# Allegro board cacio.brd
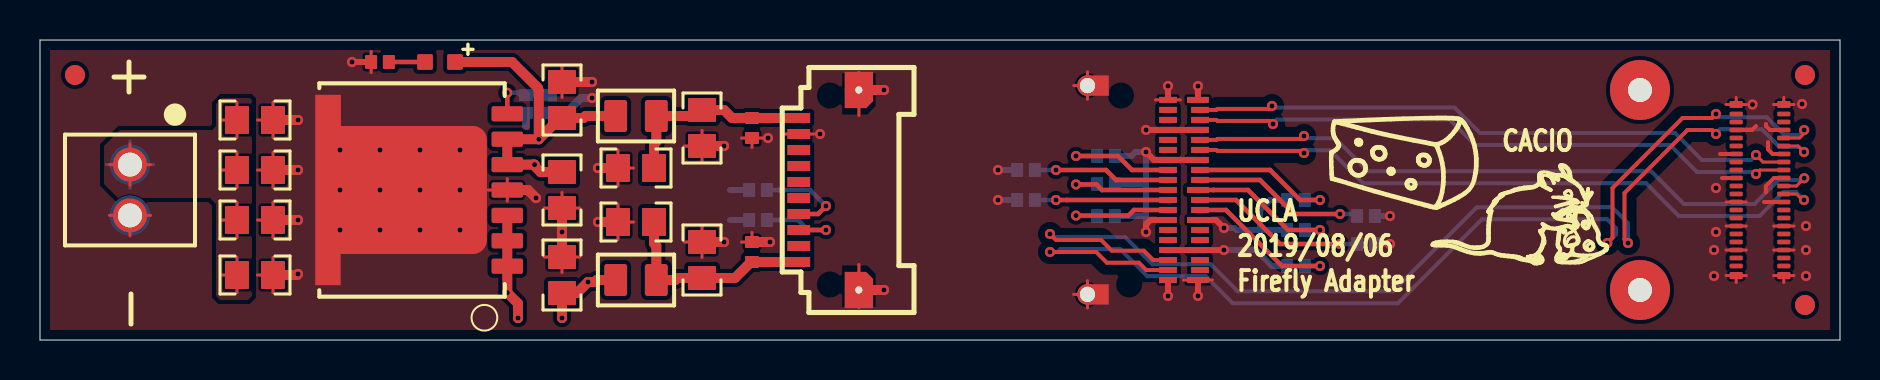
[diagram p0: board, top side]
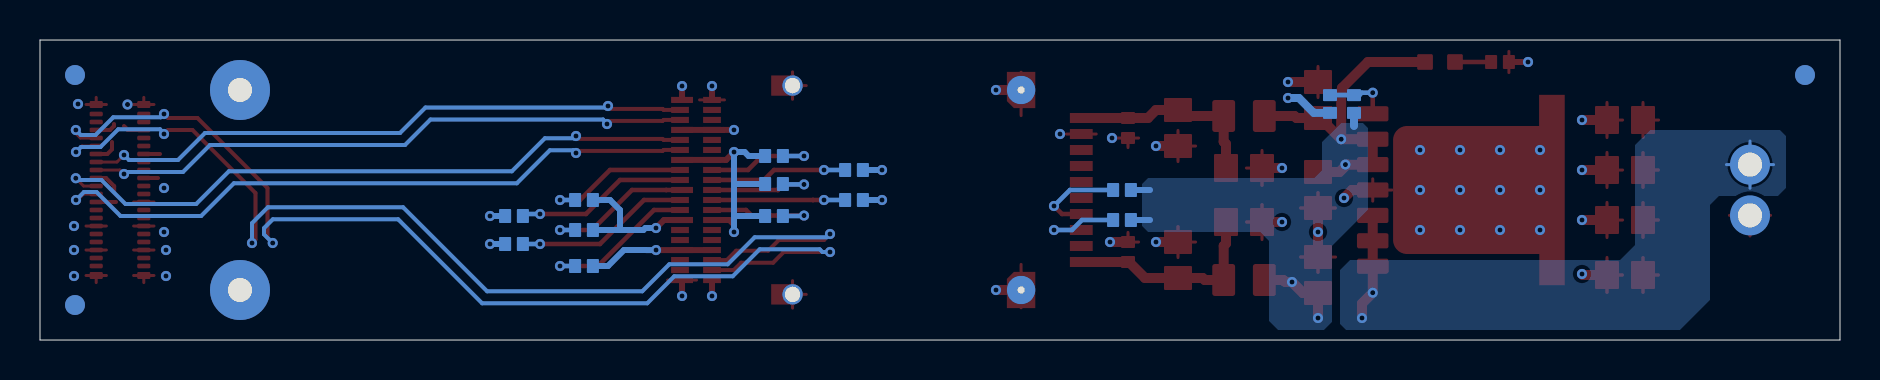
[diagram p1: board, bottom side, seen from below]

Outline 90 x 15 mm; copper layers: TOP, LAYER_1, LAYER_2, BOTTOM. Coordinates in mm from the lower left corner of the outline.
Outline path: 0,15 90,15 90,0 0,0 0,15

## Design rules (mm)
constraint set DEFAULT: min track width 0.229, pair gap 0.508
net group DP_RX: nets RXN RXP
net group DP_TX1: nets TX1N TX1P
net group DP_TX2: nets TX2N TX2P
net group DP_TX3: nets TX3N TX3P
net group DP_TX4: nets TX4N TX4P
net group POWER: nets +3V3 VCCRX VCCTX

## Placement (name value [footprint] x y rotation side)
C1  47 uF  [C0805]  26.1 12 90 top
C2  0.47 uF  [C0402]  35.6 10.6 270 top
C3  47 uF  [C0805]  33.1 10.6 270 top
C4  47 uF  [C0805]  29.8 8.6 180 top
C5  47 uF  [C0805]  26.1 3.25 90 top
C6  0.47 uF  [C0402]  35.6 4.4 90 top
C7  47 uF  [C0805]  29.8 5.9 180 top
C8  47 uF  [C0805]  33.1 4 90 top
C9  47 uF  [C0805]  10.75 11 0 top
C10  47 uF  [C0805]  10.75 8.5 0 top
C11  47 uF  [C0805]  10.75 6 0 top
C12  47 uF  [C0805]  10.75 3.25 0 top
C13  47 uF  [C0805]  26.1 7.5 270 top
D1  Green  [LED0603]  20 13.9 0 top
J1  -  [UCC8-010-1-H-S-1-A]  39.5 7.5 270 top
J2  UEC5-019-2_x4  [UEC5-019-2-H-D-RA-1-A]  54.05 7.5 270 top
J3  VTRX+_HEADER  [DF40-C-40DP-0P4V]  86 7.5 0 top
L1  1 uH  [SRP2010-1R0M]  29.8 11.2 0 top
L2  1 uH  [SRP2010-1R0M]  29.8 3 0 top
NOREF  -  []  64.25 6 0 top
NOREF#2  -  []  7.72 0 90 top
NOREF#3  -  []  0 13.35 0 top
NOREF#4  -  []  69.5 3.25 0 top
NOREF#5  -  [unnamed#2]  88.25 13.25 0 top
NOREF#6  -  [unnamed#2]  1.75 13.25 0 top
NOREF#7  -  [unnamed#2]  88.25 1.75 0 top
NOREF#8  -  [unnamed#3]  86 7.5 0 top
NOREF#9  -  [unnamed#2]  1.75 13.25 180 bottom
NOREF#10  -  [unnamed#2]  88.25 13.25 180 bottom
NOREF#11  -  [unnamed#2]  88.25 1.75 180 bottom
R1  4.7k  [R0402]  35.9 6 180 bottom
R2  4.7k  [R0402]  35.9 7.5 180 bottom
R3  49R9  [R0402]  62.8 7 0 bottom
R4  49R9  [R0402]  66.3 6.2 180 bottom
R5  49R9  [R0402]  62.8 5.5 0 bottom
R6  49R9  [R0402]  66.3 4.8 180 bottom
R7  49R9  [R0402]  62.8 3.7 0 bottom
R8  49R9  [R0402]  53.3 6.2 180 bottom
R9  49R9  [R0402]  49.3 7 0 bottom
R10  49R9  [R0402]  53.3 7.8 180 bottom
R11  49R9  [R0402]  49.3 8.5 0 bottom
R12  49R9  [R0402]  53.3 9.2 180 bottom
R13  5k6  [R0402]  24.3 11.8 270 bottom
R14  1k  [R0402]  25.5 11.8 90 bottom
R15  510R  [R0402]  17 13.9 0 top
U1  MIC69502WR  [SPAK7_MD]  18.6 7.5 90 top
U2  TE/282834-2  [TE-282834-2]  4.5 8.77 270 top

## Library data of the parts
C1-C13 = CAP NP
D1 = LED
J1 = UCC8-010-1-H-S-1-A
J2 = UEC5-019-2_x4
J3 = VTRX+_HEADER
L1 L2 = INDUCTOR
R1-R15 = R
U1 = MIC69502
U2 = TE/282834-2

## Footprints (pads in the part's own frame, mm; a bottom-side part is the same pattern mirrored in y, then rotated)
C0402
  rrect 0.6x0.7 smd: 1(-0.5,0) 2(0.5,0)
C0805
  rrect 1.2x1.4 smd: 1(-0.9,0) 2(0.9,0)
DF40-C-40DP-0P4V
  rrect 0.66x0.23 smd: 1(1.19,3.8) 2(-1.19,3.8) 3(1.19,3.4) 4(-1.19,3.4) 5(1.19,3) 6(-1.19,3) 7(1.19,2.6) 8(-1.19,2.6) 9(1.19,2.2) 10(-1.19,2.2) 11(1.19,1.8) 12(-1.19,1.8) 13(1.19,1.4) 14(-1.19,1.4) 15(1.19,1) 16(-1.19,1) 17(1.19,0.6) 18(-1.19,0.6) 19(1.19,0.2) 20(-1.19,0.2) 21(1.19,-0.2) 22(-1.19,-0.2) 23(1.19,-0.6) 24(-1.19,-0.6) 25(1.19,-1) 26(-1.19,-1) 27(1.19,-1.4) 28(-1.19,-1.4) 29(1.19,-1.8) 30(-1.19,-1.8) 31(1.19,-2.2) 32(-1.19,-2.2) 33(1.19,-2.6) 34(-1.19,-2.6) 35(1.19,-3) 36(-1.19,-3) 37(1.19,-3.4) 38(-1.19,-3.4) 39(1.19,-3.8) 40(-1.19,-3.8)
  rrect 0.66x0.35 smd: M1(1.19,4.275) M2(-1.19,4.275) M3(1.19,-4.275) M4(-1.19,-4.275)
LED0603
  rrect 0.787x0.787 smd: 1(-0.749,0) 2(0.749,0)
R0402
  rrect 0.6x0.7 smd: 1(-0.445,0) 2(0.445,0)
SPAK7_MD
  rrect 0.762x1.575 smd: 1(-3.81,-4.764) 2(-2.54,-4.764) 3(-1.27,-4.764) 4(0,-4.764) 5(1.27,-4.764) 6(2.54,-4.764) 7(3.81,-4.764)
  custom 9.52x8.581 smd: 8(0,0.546)
SRP2010-1R0M
  rrect 1.143x1.6 smd: 1(-1.016,0) 2(1.016,0)
TE-282834-2
  round 1.7 hole 1.2: 1(0,0) 2(2.54,0)
UCC8-010-1-H-S-1-A
  round 0 hole 0.89 unplated: (-4.725,0) (4.725,0)
  rect 0.5x1.14 smd: 1(-3.6,-1.56) 2(-2.8,-1.56) 3(-2,-1.56) 4(-1.2,-1.56) 5(-0.4,-1.56) 6(0.4,-1.56) 7(1.2,-1.56) 8(2,-1.56) 9(2.8,-1.56) 10(3.6,-1.56)
  custom 1.81x1.42 hole 1.16: 11(-5,1.45) 12(5,1.45)
UEC5-019-2-H-D-RA-1-A
  round 0 hole 0.889 unplated: (-4.724,0) (4.724,0.406)
  round 1.016 hole 0.762: 3(-5.22,-1.676) 4(5.22,-1.676)
  rect 0.305x1.092 smd: A1(-4.503,3.848) A4(-3.002,3.848) A7(-1.501,3.848) A10(0,3.848) A13(1.501,3.848) A16(3.002,3.848) A19(4.503,3.848)
  rect 0.305x0.889 smd: A2(-4.003,3.95) A3(-3.503,3.95) A5(-2.502,3.95) A6(-2.002,3.95) A8(-1.001,3.95) A9(-0.5,3.95) A11(0.5,3.95) A12(1.001,3.95) A14(2.002,3.95) A15(2.502,3.95) A17(3.503,3.95) A18(4.003,3.95) B1(-4.503,2.349) B2(-4.003,2.349) B3(-3.503,2.349) B4(-3.002,2.349) B5(-2.502,2.349) B6(-2.002,2.349) B7(-1.501,2.349) B8(-1.001,2.349) B9(-0.5,2.349) B10(0,2.349) B11(0.5,2.349) B12(1.001,2.349) B13(1.501,2.349) B14(2.002,2.349) B15(2.502,2.349) B16(3.002,2.349) B17(3.503,2.349) B18(4.003,2.349) B19(4.503,2.349)
unnamed#2
  round 1 smd: 1(0,0)
unnamed#3
  round 3 hole 1.2: (-6,5) (-6,-5)

## Nets
+3V3: C1.1 C5.1 C13.1 D1.2 L1.1 L2.1 R1.2 R2.2 R13.2 U1.5 U1.6(OUT#6)
+VIN: C9.1 C10.1 C11.1 C12.1 U1.1 U1.2 U1.3 U2.1
GND: C1.2 C2.2 C3.2 C4.2 C5.2 C6.2 C7.2 C8.2 C9.2 C10.2 C11.2 C12.2 C13.2 J1.2 J1.11 J1.12 J2.3 J2.4 J2.A1 J2.A4 J2.A7 J2.A13 J2.A16 J2.A19 J2.B1 J2.B4 J2.B7 J2.B13 J2.B16 J2.B19 J3.5 J3.6 J3.11 J3.12 J3.17 J3.18 J3.23 J3.24 J3.29 J3.30 J3.35 J3.36 J3.M1 J3.M2 J3.M3 J3.M4 R3.1 R4.1 R5.1 R6.1 R7.1 R8.1 R9.1 R10.1 R11.1 R12.1 R14.1 R15.1 U1.4 U1.8 U2.2
VCCRX: C6.1 C7.1 C8.1 J1.10 L2.2
VCCTX: C2.1 C3.1 C4.1 J1.1(VCCTX) L1.2
ADJ: R13.1 R14.2 U1.7
K: D1.1(CATHODE) R15.2
RSVD / VCC1V8: J1.9
RXN: J2.B18 J3.7
RXP: J2.B17 J3.9
SCL: J1.8 R1.1
SDA: J1.7 R2.1
T0: J2.A8 R3.2
T1: J2.A9 R4.2
T2: J2.A10 R5.2
T3: J2.A11 R6.2
T4: J2.A12 R7.2
T5: J2.B8 R12.2
T6: J2.B9 R11.2
T7: J2.B10 R10.2
T8: J2.B11 R9.2
T9: J2.B12 R8.2
TX1N: J2.A2 J3.13
TX1P: J2.A3 J3.15
TX2N: J2.A5 J3.19
TX2P: J2.A6 J3.21
TX3N: J3.25
TX3P: J3.27
TX4N: J3.31
TX4P: J3.33

Pads without a net: J1 3 4 5 6; J2 A14 A15 A17 A18 B2 B3 B5 B6 B14 B15; J3 1 2 3 4 8 10 14 16 20 22 26 28 32 34 37 38 39 40; NOREF#5 1; NOREF#6 1; NOREF#7 1; NOREF#9 1; NOREF#10 1; NOREF#11 1

## Via types
v1: diameter 0.508, hole 0.254, TOP to BOTTOM, 87 vias

## Routing (per net, layer and track width the routed paths; a pad name or vN(x,y) marks a point on that pad's centre or on a via; arc(x,y) is an arc through that point)
+3V3: length 24.2
  TOP w0.5: L2.1 27.84,3 27.74,2.9 v1(27.4,2.9) 26.85,2.35 C5.1 v1(26.1,1.1) ; 24.65,8.77 U1.5 U1.6 v1(24.94,10.04) ; 24.65,8.77 25.02,8.4 C13.1 ; 24.65,8.77 v1(24.73,8.77) ; D1.2 23.6,13.9 24.9,12.6 24.9,12.5 24.94,12.46 v1(24.94,10.04) ; L1.1 27.28,11.2 27.18,11.1 C1.1 26,11.1 v1(24.94,10.04)
  BOTTOM w0.3: R1.2 34.5,6 ; R2.2 34.5,7.5
  BOTTOM w0.4: R13.2 24.3,10.7
+VIN: length 24.3
  TOP w0.15: 9.85,5.12 C11.1 ; C11.1 9.07,6 ; C11.1 9.85,6.88 ; 9.85,7.62 C10.1 ; C10.1 9.85,9.38 ; C10.1 9.07,8.5 ; U2.1 5.53,8.77 ; U2.1 3.47,8.77 ; U2.1 4.5,7.74 ; U2.1 4.5,9.8 ; 9.07,3.25 C12.1 ; C12.1 9.85,2.37 ; C12.1 9.85,4.13 ; C9.1 9.85,11.88 ; C9.1 9.85,10.12 ; C9.1 9.07,11
  TOP w0.5: v1(23.9,1.1) 23.9,1.83 v1(23.36,2.36) U1.1 U1.2 U1.3
  BOTTOM w0.15: U2.1 5.68,8.77 ; U2.1 4.5,9.95 ; U2.1 4.5,7.59 ; U2.1 3.32,8.77
GND: length 154.3
  TOP w0.15: C13.2 26.98,6.6 ; C13.2 26.1,7.38 ; C13.2 25.22,6.6 ; J3.M2 85.32,11.78 ; J3.M2 84.3,11.78 ; J3.M2 84.81,12.13 ; 23.36,6.94 U1.4 ; U1.4 22.4,7.5 ; U1.4 23.36,8.06 ; 84.3,4.5 J3.36 85.32,4.5 ; 11.65,2.37 C12.2 ; C12.2 10.87,3.25 ; C12.2 11.65,4.13 ; C2.2 36.13,10.1 ; C2.2 35.07,10.1 ; C2.2 35.6,9.62 ; C4.2 28.9,9.48 ; C4.2 29.68,8.6 ; C4.2 28.9,7.72 ; J2.3 53.06,12.72 ; J2.3 52.37,12.03 ; J2.3 52.37,13.41 ; J2.3 51.69,12.72 ; 10.87,8.5 C10.2 ; C10.2 11.65,7.62 ; C10.2 11.65,9.38 ; 10.87,6 C11.2 ; C11.2 11.65,5.12 ; C11.2 11.65,6.88 ; J3.M3 87.7,3.22 ; J3.M3 87.19,2.87 ; J3.M3 86.68,3.22 ; 40.95,11.22 J1.11 40.95,13.39 ; 16.56,13.37 R15.1 16.56,14.43 ; 25.22,4.15 C5.2 ; C5.2 26.98,4.15 ; C5.2 26.1,3.37 ; 84.3,5.7 J3.30 85.32,5.7 ; 28.9,5.02 C7.2 ; C7.2 29.68,5.9 ; C7.2 28.9,6.78 ; 40.95,1.61 J1.12 40.95,3.78 ; 3.47,6.23 U2.2 ; U2.2 5.53,6.23 ; U2.2 4.5,5.2 ; 87.7,4.5 J3.35 86.68,4.5 ; 86.68,11.78 J3.M1 ; J3.M1 87.19,12.13 ; J3.M1 87.7,11.78 ; 57.02,12 J2.B1 55.78,12 ; 84.81,2.87 J3.M4 ; J3.M4 85.32,3.22 ; J3.M4 84.3,3.22 ; 84.3,6.9 J3.24 85.32,6.9 ; 35.07,4.9 C6.2 35.6,5.38 ; 26.1,13.68 C1.2 26.1,12.12 ; 51.69,2.28 J2.4 ; J2.4 52.37,2.97 ; J2.4 52.37,1.59 ; J2.4 53.06,2.28 ; 58.62,3 J2.A19 57.17,3 ; 87.7,5.7 J3.29 86.68,5.7 ; 33.1,8.92 C3.2 ; C3.2 32.22,9.7 ; C3.2 33.1,10.48 ; 10.87,11 C9.2 ; C9.2 11.65,11.88 ; C9.2 11.65,10.12 ; 32.22,4.9 C8.2 ; C8.2 33.1,4.12 ; C8.2 33.1,5.68 ; 38.68,10.3 J1.2 37.19,10.3
  TOP w0.2: J3.6 85.6,10.5 85.8,10.7 ; J3.11 86.63,9.3 86.4,9.53 86.4,9.9 ; J3.18 84.1,8.1 ; J3.5 86.5,10.5 86.3,10.7 86.3,10.8 ; J3.12 84,9.3 ; J3.23 86.2,6.9 ; J3.17 86.7,8.1 86.29,7.69 86.29,7.41 86.3,7.4
  TOP w0.3: J2.B13 55.53,6 55.3,5.77 v1(55.3,5.4) ; v1(55.3,10.5) 55.85,10.5 55.85,10.5 J2.B4 J2.A4 ; J2.B19 v1(56.4,2.2) ; J2.A13 58.8,6 v1(59.2,5.6) ; J2.B16 J2.A16 v1(59.2,4.5) ; v1(57.9,12.7) J2.A1 ; v1(56.4,12.7) J2.B1 ; R15.1 v1(15.6,13.9) ; J2.A7 J2.B7 55.7,9 v1(55.3,9.4) ; J2.A19 v1(57.9,2.2)
  TOP w0.5: C9.2 v1(12.9,11) ; C5.2 v1(26.1,5.4) C13.2 ; C1.2 v1(27.6,12.9) ; C8.2 v1(34.2,4.9) ; C3.2 v1(34.2,9.7) ; C4.2 v1(27.9,8.6) ; J1.11 v1(42.2,12.5) ; v1(24.8,7.1) 24.4,7.5 U1.4 ; J1.12 v1(42.2,2.5) ; C6.2 v1(36.5,4.9) ; C11.2 v1(12.9,6) ; C7.2 v1(27.9,5.9) ; C12.2 12.85,3.25 v1(12.9,3.3) ; C10.2 v1(12.9,8.5)
  LAYER_1 w0.15: J1.11 40.95,13.39 ; J1.11 41.83,12.5 ; J1.11 40.95,11.61 ; J2.4 53.06,2.28 ; J2.4 51.69,2.28 ; J2.4 52.37,1.59 ; J2.4 52.37,2.97 ; 51.69,12.72 J2.3 ; J2.3 52.37,12.03 ; J2.3 52.37,13.41 ; J2.3 53.06,12.72 ; 3.47,6.23 U2.2 ; U2.2 5.53,6.23 ; U2.2 4.5,5.2 ; U2.2 4.5,7.26 ; J1.12 40.95,3.39 ; J1.12 40.95,1.61 ; J1.12 41.83,2.5
  LAYER_2 w0.15: J1.12 41.83,2.5 ; J1.12 40.95,3.39 ; J1.12 40.95,1.61 ; J2.4 53.06,2.28 ; J2.4 51.69,2.28 ; J2.4 52.37,2.97 ; J2.4 52.37,1.59 ; 40.95,11.61 J1.11 ; J1.11 41.83,12.5 ; J1.11 40.95,13.39 ; J2.3 53.06,12.72 ; J2.3 51.69,12.72 ; J2.3 52.37,13.41 ; J2.3 52.37,12.03 ; 3.47,6.23 U2.2 ; U2.2 4.5,5.2 ; U2.2 5.53,6.23 ; U2.2 4.5,7.26
  BOTTOM w0.3: v1(59.2,5.6) 59.73,5.6 59.83,5.5 61,5.5 ; v1(59.2,4.5) 59.73,4.5 59.73,4.5 60.8,4.5 61.6,3.7 R7.1 ; R12.1 54.57,9.2 54.77,9.4 v1(55.3,9.4) 55.3,8.87 55.3,8.87 55.3,7.8 ; R10.1 55.3,7.8 ; 55.3,7.8 55.3,6.2 ; 55.3,6.2 R8.1 ; 55.3,6.2 v1(55.3,5.4) ; R5.1 61,5.5 ; 61,5.5 61,6.5 61.5,7 R3.1 ; R9.1 v1(47.9,7) ; R6.1 v1(67.5,4.8) ; R4.1 v1(67.5,6.2) ; R11.1 v1(47.9,8.5)
  BOTTOM w0.4: R14.1 26.31,11.36 27.05,12.1 v1(27.6,12.1)
  vias: v1(15,9.5) v1(15,7.5) v1(15,5.5) v1(17,9.5) v1(17,7.5) v1(17,5.5) v1(19,9.5) v1(19,7.5) v1(19,5.5) v1(21,9.5) v1(21,7.5) v1(21,5.5) v1(36.4,10.1) v1(39,10.3) v1(83.7,4.5) v1(83.7,3.2) v1(83.8,7.6) v1(83.8,5.4) v1(85.62,11.78) v1(88.1,11.8) v1(88.3,5.7) v1(88.3,4.5) v1(88.3,3.2)
VCCRX: length 10.4
  TOP w0.5: J1.10 C6.1 35.55,3.9 34.75,3.1 C8.1 31.86,3.1 31.76,3 L2.2 30.82,4.71 30.7,4.82 C7.1
VCCTX: length 10.1
  TOP w0.5: J1.1 C2.1 34.6,11.1 34.2,11.5 C3.1 32.8,11.2 L1.2 30.82,9.92 30.7,9.8 C4.1
ADJ: length 3.2
  TOP w0.229: U1.7 v1(23.36,12.36)
  BOTTOM w0.229: v1(23.36,12.36) 23.91,12.36 24.03,12.24 R13.1 R14.2
K: length 1.8
  TOP w0.229: R15.2 D1.1
RXN: length 54.4
  TOP w0.15: J3.7 87.98,10.1 88.21,10.33 v1(88.21,10.5)
  TOP w0.2: v1(50.5,4.4) 52.81,4.4 53.34,3.86 54.94,3.86 55.31,3.5 J2.B18 ; v1(78.36,4.85) 78.62,5.11 78.62,7.6 82.13,11.1 83.6,11.1 v1(83.8,11.3)
  BOTTOM w0.2: v1(88.21,10.5) 87.96,10.25 87.22,10.25 86.34,11.14 83.96,11.14 v1(83.8,11.3) ; v1(50.5,4.4) 50.88,4.4 51.02,4.54 54.01,4.54 55.36,3.19 58.29,3.19 59.64,1.84 67.89,1.84 72.09,6.04 78.36,6.04 78.8,5.59 78.8,5.29 v1(78.36,4.85)
RXP: length 54.2
  TOP w0.15: v1(88.2,9.4) 87.9,9.7 J3.9
  TOP w0.2: v1(83.8,10.3) 83.6,10.5 82.38,10.5 79.22,7.35 79.22,5.03 v1(79.4,4.85) ; v1(50.5,5.3) 50.8,5 53.06,5 53.59,4.46 55.19,4.46 55.66,4 J2.B17
  BOTTOM w0.2: v1(83.8,10.3) 83.8,10.34 84,10.54 86.09,10.54 86.97,9.65 87.95,9.65 v1(88.2,9.4) ; v1(79.4,4.85) 79.4,5.84 78.61,6.64 71.84,6.64 67.64,2.44 59.89,2.44 58.54,3.79 55.61,3.79 54.26,5.14 50.66,5.14 v1(50.5,5.3)
SCL: length 4.5
  TOP w0.229: J1.8 v1(39.3,5.5)
  BOTTOM w0.229: v1(39.3,5.5) 38.4,5.5 37.9,6 R1.1
SDA: length 4.8
  TOP w0.229: J1.7 38.9,6.3 v1(39.3,6.7)
  BOTTOM w0.229: v1(39.3,6.7) 38.5,7.5 R2.1
T0: length 7.4
  TOP w0.229: J2.A8 61.5,8.5 63,7 v1(64,7)
  BOTTOM w0.229: R3.2 v1(64,7)
T1: length 8.6
  TOP w0.229: 58,8 61,8 62.7,6.3 v1(65,6.3)
  BOTTOM w0.229: v1(65,6.3) 65.76,6.3 R4.2
T2: length 7.7
  TOP w0.229: v1(64,5.5) 62.4,5.5 60.4,7.5 58.69,7.5 J2.A10
  BOTTOM w0.229: R5.2 v1(64,5.5)
T3: length 8.8
  TOP w0.229: J2.A11 59.8,7 62,4.8 v1(65,4.8)
  BOTTOM w0.229: R6.2 v1(65,4.8)
T4: length 7.9
  TOP w0.229: J2.A12 59.3,6.5 62.1,3.7 v1(64,3.7)
  BOTTOM w0.229: R7.2 v1(64,3.7)
T5: length 5.9
  TOP w0.229: J2.B8 54.6,8.5 53.9,9.2 v1(51.8,9.2)
  BOTTOM w0.229: v1(51.8,9.2) R12.2
T6: length 6.9
  TOP w0.229: v1(50.8,8.5) 53.3,8.5 53.8,8 56.4,8
  BOTTOM w0.229: R11.2 v1(50.8,8.5)
T7: length 5.8
  TOP w0.229: J2.B10 53.1,7.5 52.82,7.78 v1(51.8,7.78)
  BOTTOM w0.229: R10.2 52.83,7.78 v1(51.8,7.78)
T8: length 6.7
  TOP w0.229: v1(50.8,7) 51.35,7 J2.B11
  BOTTOM w0.229: R9.2 v1(50.8,7)
T9: length 5.8
  TOP w0.229: v1(51.8,6.22) 54.42,6.22 54.7,6.5 J2.B12
  BOTTOM w0.229: v1(51.8,6.22) 51.82,6.2 R8.2
TX1N: length 30.6
  TOP w0.15: J3.13 86.15,8.9 v1(85.8,9.25)
  TOP w0.2: J2.A2 58.82,11.5 58.87,11.55 61.45,11.55 v1(61.6,11.7)
  BOTTOM w0.2: v1(61.6,11.7) 61.67,11.62 70.72,11.62 72,10.35 81.75,10.35 83.1,9 85.55,9 v1(85.8,9.25)
TX1P: length 30.6
  TOP w0.15: J3.15 86,8.5 v1(85.8,8.3)
  TOP w0.2: J2.A3 58.82,11 58.87,10.95 61.5,10.95 v1(61.65,10.8)
  BOTTOM w0.2: v1(61.65,10.8) 61.65,10.82 61.85,11.03 70.47,11.03 71.75,9.75 81.5,9.75 82.85,8.4 85.7,8.4 v1(85.8,8.3)
TX2N: length 33.4
  TOP w0.15: J3.19 87.82,7.7 v1(88.21,8.09)
  TOP w0.2: v1(63.2,10.2) 63.05,10.05 58.87,10.05 58.82,10 J2.A5
  BOTTOM w0.2: v1(63.2,10.2) 63.31,10.09 64.76,10.09 66.41,8.44 80.56,8.44 82.19,6.8 85.73,6.8 86.93,8 88.12,8 v1(88.21,8.09)
TX2P: length 33.5
  TOP w0.15: J3.21 87.82,7.3 88.12,7 v1(88.2,7)
  TOP w0.2: v1(63.2,9.35) 63.1,9.45 58.87,9.45 58.82,9.5 J2.A6
  BOTTOM w0.2: v1(88.2,7) 87.8,7.4 87.17,7.4 85.97,6.2 81.94,6.2 80.31,7.84 66.16,7.84 64.51,9.49 63.34,9.49 v1(63.2,9.35)

## Copper pours and planes (outline as drawn; the poured copper is in the pictures)
+3V3 on BOTTOM: 25.4,4.7 25.4,0.9 25.8,0.5 28.1,0.5 28.55,0.95 28.55,4.95 29,5.4 34.6,5.4 34.9,5.7 34.9,7.8 34.6,8.1 26.3,8.1 25.9,8.5 25.9,9.9 24.95,10.85 23.85,10.85 23.6,10.6 23.6,6.5
+VIN on TOP: 8.8,10.7 8.8,11.8 9.1,12.1 10.5,12.1 10.6,12 10.6,2.2 10.4,2 9,2 8.8,2.2 8.8,6.8 8.5,7.1 3.9,7.1 3.2,7.8 3.2,9.7 4,10.5 8.6,10.5
+VIN on BOTTOM: 24.7,0.5 25,0.8 25,3.5 24.5,4 11,4 10.25,4.75 10.25,9.75 9.5,10.5 3,10.5 2.7,10.2 2.7,7.6 3.1,7.2 6.05,7.2 6.5,6.75 6.5,2 8,0.5
GND on TOP: 0.5,14.5 89.5,14.5 89.5,0.5 0.5,0.5
GND on LAYER_1, LAYER_2: 0.5,14.5 0.5,0.5 89.5,0.5 89.5,14.5
GND on TOP (solid shape): 53.44,12.21 52.37,12.21 51.87,12.72 52.37,13.23 53.44,13.23
GND on TOP (solid shape): 53.44,1.77 52.37,1.77 51.87,2.28 52.37,2.79 53.44,2.79

## Text on the board
BOTTOM: BOTTOM
Ref Des/Assembly Bottom: ASSEMBLY BOTTOM
Package Geometry/Pastemask Bottom: PASTE BOTTOM
Ref Des/Silkscreen Bottom: SILK BOTTOM
User.Comments: MASK TOP | MASK BOTTOM | DRILL
Board Geometry/Outline: OUTLINE
TOP: TOP
Ref Des/Assembly Top: ASSEMBLY TOP
Package Geometry/Pastemask Top: PASTE TOP
Ref Des/Silkscreen Top: UCLA | 2019/08/06 | Firefly Adapter | CACIO | SILK TOP
LAYER_1: LAYER 1 (GND)
LAYER_2: LAYER 2 (GND)
NCLEGEND-1-4: FIGURE | FINISHED_SIZE | 0.254 | 0.762 | 1.16 | 1.2 | 0.889 | 0.89 | DRILL CHART: TOP to BOTTOM | ALL UNITS ARE IN MILLIMETERS | PLATED | NON-PLATED | QTY | 87 | 2 | 1
